# EAGLE board eeZee_tiny (EAGLE 6.1)
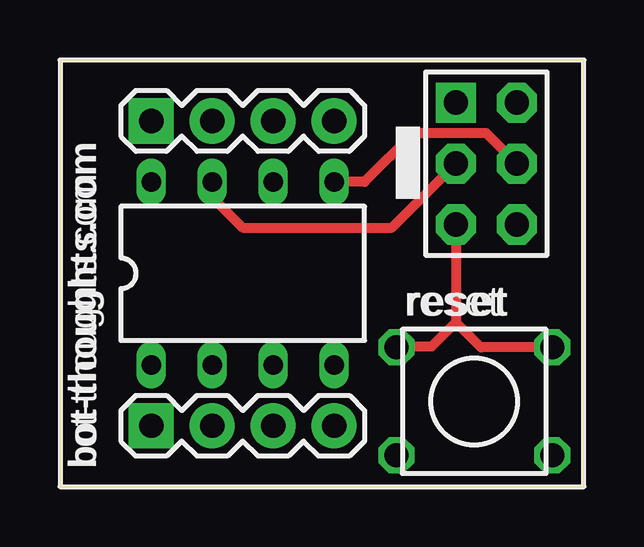
[diagram p0: board, top side]
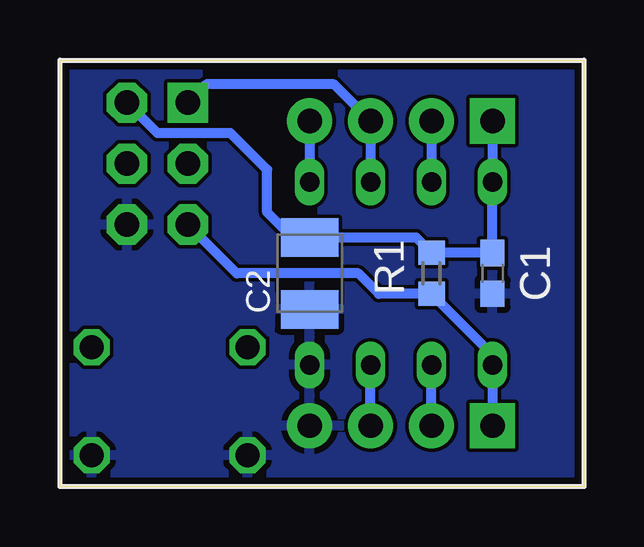
[diagram p1: board, bottom side, seen from below]

Size 21.84 x 17.78 mm. Coordinates in mm from the lower left corner, seen from the top.
Outline: 0,0 21.84,0 21.84,17.78 0,17.78 0,0
Copper layers (1*16): Top 0.0356mm / dielectric 1.5011mm / Bottom 0.0356mm
Design rules: minimum track width 6mil, minimum drill 13mil, track to track 6mil, track to pad 6mil, pad to pad 6mil, via to via 6mil, smd to smd 6mil, copper to edge 15mil, drill to drill 6mil, minimum pad ring 7mil, minimum via ring 7mil, stop-mask expansion 4mil, vias tented up to drill 0mil, thermal gap 10mil

## Footprints (pad centres in the part's own frame; a part is rotated, then mirrored left to right if it is on the bottom)
C0603 = smd 1.1 x 1: 1 -0.85,0; 2 0.85,0
SMC_B = smd 1.6 x 2.4: + -1.5,0; - 1.5,0
DIL08 = drill 0.813 long: 1 -3.81,-3.81; 2 -1.27,-3.81; 3 1.27,-3.81; 4 3.81,-3.81; 5 3.81,3.81; 6 1.27,3.81; 7 -1.27,3.81; 8 -3.81,3.81
CON6P2R = drill 1.016 pad 1.676 square: 1 -2.54,-1.27 | drill 1.016 pad 1.676 octagon: 2 -2.54,1.27; 3 0,-1.27; 4 0,1.27; 5 2.54,-1.27; 6 2.54,1.27
1X04 = drill 1.016 pad 1.88 square: 1 0,0 | drill 1.016 pad 1.88: 2 2.54,0; 3 5.08,0; 4 7.62,0
R0603 = smd 1 x 1.1: 1 -0.85,0; 2 0.85,0
6MMTACTILE_4PIN = drill 1 octagon: A1 3.25,-2.25; A2 -3.25,-2.25; B1 3.25,2.25; B2 -3.25,2.25

## Placement (x,y rotation side)
C1  0.1uF  [C0603]  3.81,8.89 270 bottom
C2  100uF  [SMC_B]  11.43,8.89 270 bottom
IC1  attiny  [DIL08]  7.62,8.89 0 top
J2  avrisp  [CON6P2R]  17.78,13.46 270 top
JP1  [1X04]  3.81,2.54 0 top
JP2  [1X04]  3.81,15.24 0 top
R1  10k  [R0603]  6.35,8.89 90 bottom
S2  reset  [6MMTACTILE_4PIN]  17.27,3.56 0 top

## Library data of the parts
C1 = rcl; BOM: EXCLUDE; PARTNO: 0603YC104KAT2A
C2 = rcl; BOM: INCLUDE; PARTNO: F930J107MBA
IC1 = avr; PARTNO: A08-LC-TT-R
J2 = ads4
JP1 JP2 = SparkFun; BOM: INCLUDE; PARTNO: 2211S-04G
R1 = rcl; PARTNO: ERJ-3GEYJ103V
S2 = mes_electromech

## Nets
!RESET: IC1.1 J2.5 JP1.1 R1.1 S2.B1 S2.B2
GND: C1.2 C2.- IC1.4 J2.6 JP1.4 S2.A1 S2.A2
MISO: IC1.6 J2.1 JP2.3
MOSI: IC1.5 J2.4 JP2.4
N$2: IC1.2 JP1.2
N$8: IC1.3 JP1.3
SCK: IC1.7 J2.3 JP2.2
VCC: C1.1 C2.+ IC1.8 J2.2 JP2.1 R1.2

## Tracks (layer width: path | path; a pad name or v marks a point on that pad's centre or on a via)
!RESET
  Top 0.406: J2.5 16.51,6.86 | 16.51,6.86 15.49,5.84 14.06,5.84 S2.B2 | S2.B1 17.56,5.81 16.51,6.86
  Bottom 0.406: JP1.1 IC1.1 3.81,5.5 R1.1 8.55,8.04 9.4,8.89 14.48,8.89 J2.5
GND
  pour Bottom: 0,17.78 21.59,17.78 21.59,0 0,0
MISO
  Bottom 0.406: IC1.6 JP2.3 10.41,16.76 15.75,16.76 J2.1
MOSI
  Top 0.406: IC1.5 12.7,12.7 14.73,14.73 17.78,14.73 J2.4
  Bottom 0.406: JP2.4 IC1.5
N$2
  Bottom 0.406: JP1.2 IC1.2
N$8
  Bottom 0.406: JP1.3 IC1.3
SCK
  Top 0.406: IC1.7 6.35,12.06 7.62,10.79 13.84,10.79 J2.3
  Bottom 0.406: JP2.2 IC1.7
VCC
  Bottom 0.406: JP2.1 IC1.8 C1.1 R1.2 7,10.39 C2.+ 12.17,10.39 13.21,11.43 13.21,13.21 14.73,14.73 17.78,14.73 J2.2

## Text on the board
tNames: bot-thoughts.com
_tsilk: reset | bot-thoughts.com
_bsilk: C1 | R1 | C2